# Altium PCB 四路输出继电器工控板.PCBDOC (part 1 of 2)
Units mm, origin at the board's own origin, x right, y up, seen from the top; angles counter-clockwise.
Board outline 152.4 x 101.6 mm, 2 copper layers (Top Layer, Bottom Layer); 59 components, 86 nets, 225 pads, 6 vias.
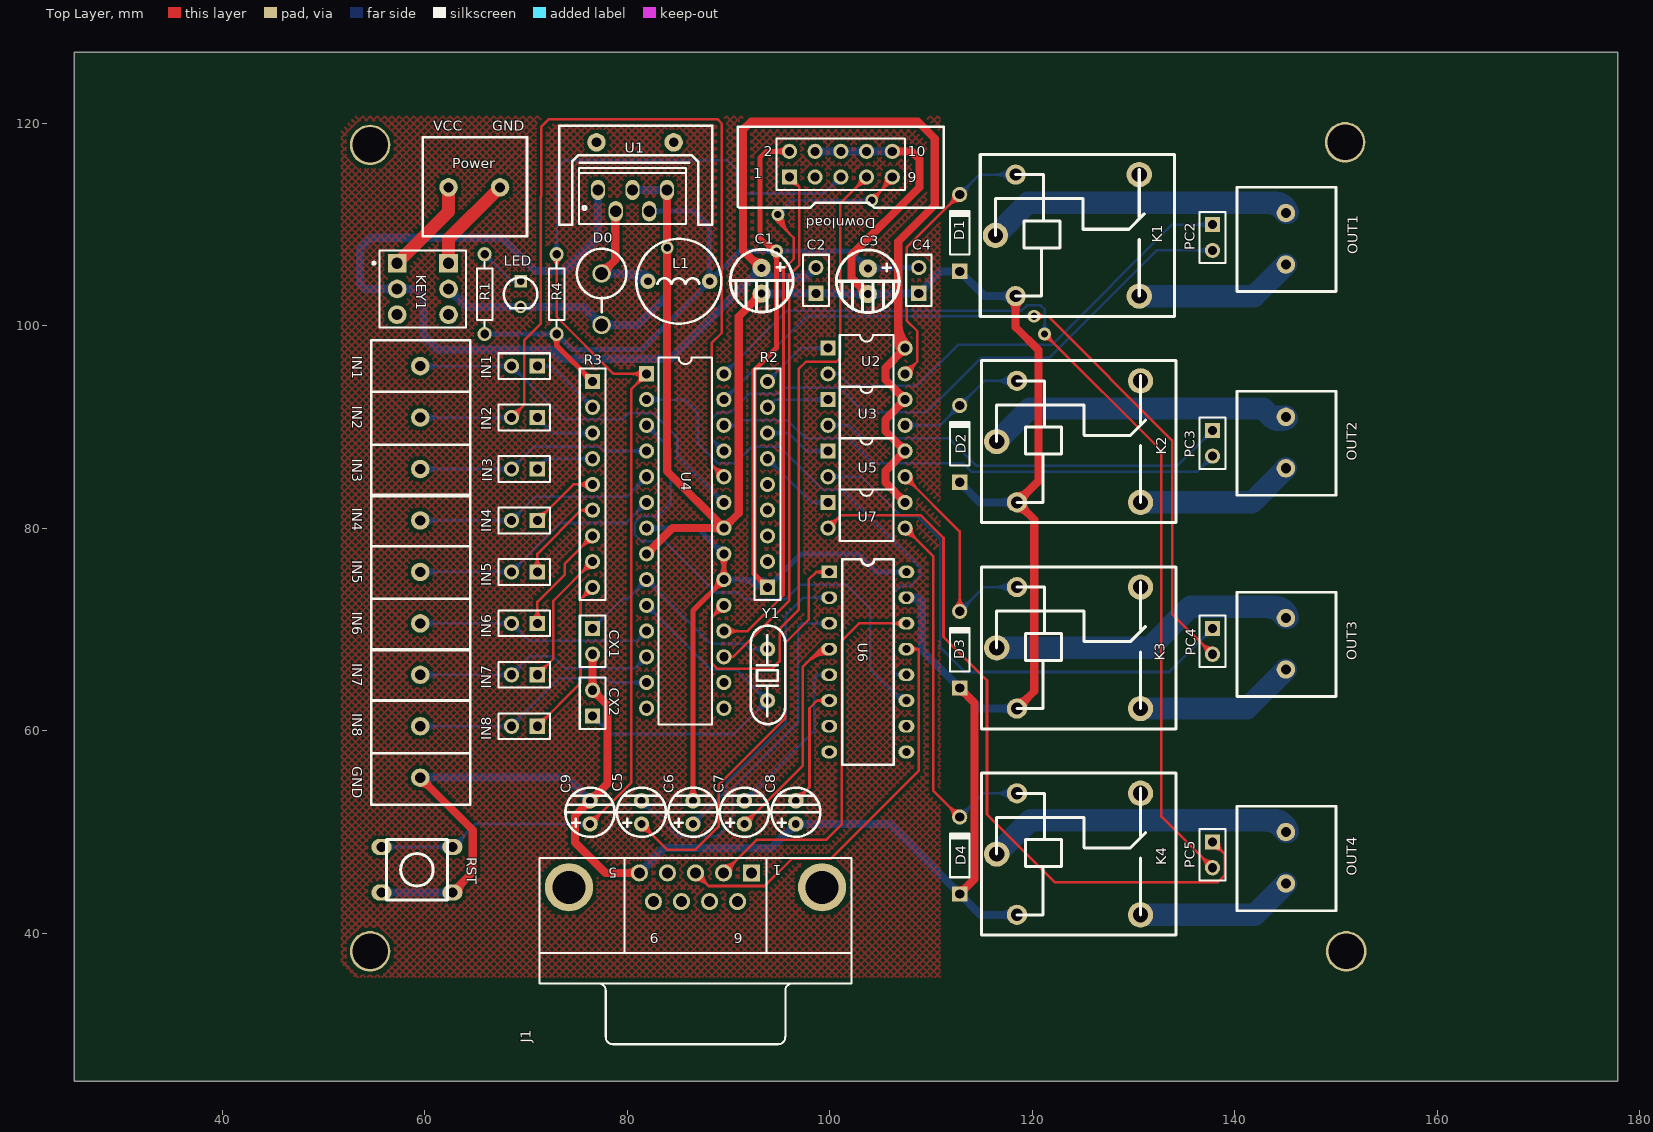
[diagram p0: Top Layer view]
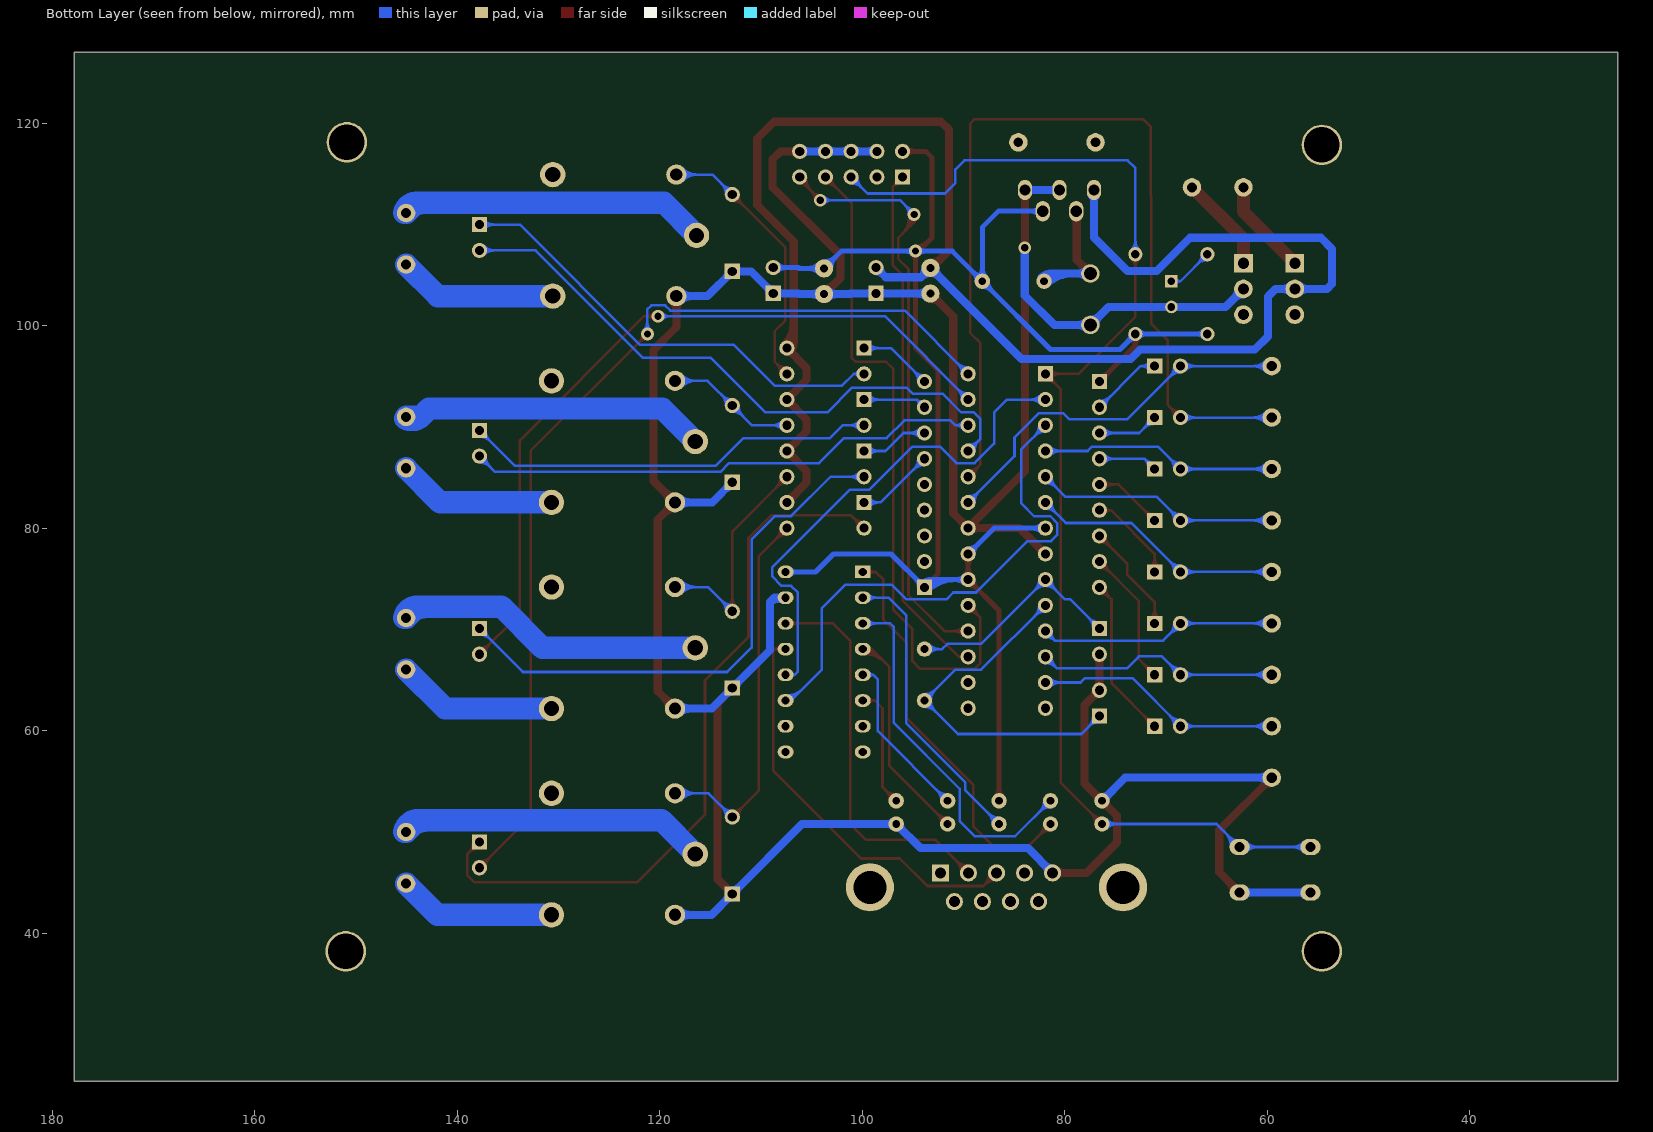
[diagram p1: Bottom Layer view, seen from below]

## Layer stack, top to bottom
Top Layer: signal copper 0.0356
Dielectric: dielectric 0.32, FR-4, Dk 4.8
Bottom Layer: signal copper 0.0356

## Board outline
25.4,25.4 177.8,25.4 177.8,127 25.4,127

## Design rules (kind name [scope] priority, off if disabled: settings)
Clearance [All] p1: gap=0.3
ComponentClearance [All] p1: gap=0.254 collisioncheckmode=3 verticalgap=0.254
PlaneClearance [All] p1: clearance=0.8
PolygonConnect [All] p1: connectstyle=Relief reliefconductorwidth=0.254 reliefentries=4 polygonreliefangle="90 Angle"
RoutingVias [All] p1: holewidth=0.711 width=1.27 viastyle="Through Hole" minholewidth=0.711 minwidth=1.27 maxholewidth=0.711 maxwidth=1.27
SolderMaskExpansion [All] p1: expansion=0.102
TestPointUsage [All] p1: valid=0 allowmultiple=FALSE
Testpoint [All] p1: side=15 testpointundercomponent=TRUE minsize=1.016 maxsize=2.54 preferedsize=1.524 minholesize=0 maxholesize=1.016 preferedholesize=0.813 testpointgrid=0.025 style=1023 order=0123456789
Width Width_7 [InNet('VCC')] p1: maxlimit=0.5 minlimit=0.5 preferedwidth=0.5
Width Width_6 [InNet('NetD0_1')] p2: maxlimit=0.8 minlimit=0.8 preferedwidth=0.8
Width Width_1 [InNet('+12V')] p3: maxlimit=0.8 minlimit=0.8 preferedwidth=0.8
Width Width_3 [InNet('GND')] p4: maxlimit=0.8 minlimit=0.8 preferedwidth=0.8
Width Width_2 [(InNet('NetK1_1') OR InNet('NetK1_3') OR InNet('NetK2_1') OR InNet('NetK2_3') OR InNet('NetK3_1') OR InNet('NetK3_3') OR InNet('NetK4_1') OR InNet('NetK4_3') OR InNet('NetK5_1') OR InNet('NetK5_3') OR InNet('NetK6_1') OR InNet('NetK6_3') OR InNet('NetK7_1') OR InNet('NetK7_3') OR InNet('NetK8_1') OR InNet('NetK8_3'))] p5: maxlimit=2.5 minlimit=2.5 preferedwidth=2.5
Width Width_5 [InNet('NetKEY1_6')] p6: maxlimit=1.254 minlimit=1.254 preferedwidth=1.254
Width Width_4 [InNet('NetKEY1_1')] p7: maxlimit=1.254 minlimit=1.254 preferedwidth=1.254
Width [All] p8: maxlimit=0.254 minlimit=0.254 preferedwidth=0.254
16 further rules are at their usual default settings.

## Components (designator, comment, footprint, x,y, rotation, side; value= is the part's Value field where it differs from the comment)
C1 "DJDR" C-DJ-6 93.345,103.124 r270 top
C2 "CPDR" CPDR 98.628,104.47 r90 top
C3 "DJDR" C-DJ-6 103.835,103.073 r270 top
C4 "CPDR" CPDR 108.788,104.47 r90 top
C5 "10uf" C-DJ-4 83.947,53.213 r90 top
C6 "10uf" C-DJ-4 89.027,53.213 r90 top
C7 "10uf" C-DJ-4 94.107,53.213 r90 top
C8 "10uf" C-DJ-4 99.187,53.213 r90 top
C9 "10uf" C-DJ-4 78.867,53.213 r90 top
CX1 "30p" HDR1X2 76.581,70.104 r270 top
CX2 "30p" HDR1X2 76.581,61.468 r90 top
D0 "WY2JG" ZCDZL 80.01,102.616 r0 top
D1 "ZL2JG" D-ZL-10 112.776,112.903 r90 top
D2 "ZL2JG" D-ZL-10 112.776,92.075 r90 top
D3 "ZL2JG" D-ZL-10 112.776,71.755 r90 top
D4 "ZL2JG" D-ZL-10 112.776,51.435 r90 top
Download "Download" HDR-2x5 101.092,114.808 r0 top (schematic designator 1)
IN1 "LED" HDR1X2 71.12,96.012 r180 top (schematic designator PD1)
IN1 "PZ_3" JK128_3 61.468,91.059 r0 top
IN2 "LED" HDR1X2 71.12,90.932 r180 top (schematic designator PD2)
IN2 "PZ_3" JK128_3 61.468,75.819 r0 top
IN3 "" JK128_3 61.468,60.579 r0 top
IN3 "LED" HDR1X2 71.12,85.852 r180 top (schematic designator PD3)
IN4 "LED" HDR1X2 71.12,80.772 r180 top (schematic designator PD4)
IN5 "LED" HDR1X2 71.12,75.692 r180 top (schematic designator PD5)
IN6 "LED" HDR1X2 71.12,70.612 r180 top (schematic designator PD6)
IN7 "LED" HDR1X2 71.12,65.532 r180 top (schematic designator PD7)
IN8 "LED" HDR1X2 71.12,60.452 r180 top (schematic designator PD8)
J1 "D Connector 9" DSUB1.385-2H9 86.741,35.052 r180 top
K1 "JDQYCK" JQC-3F/T73 116.84,103.432 r0 top
K2 "JDQYCK" JQC-3F/T73 116.967,83.068 r0 top
K3 "JDQYCK" JQC-3F/T73 116.967,62.704 r0 top
K4 "JDQYCK" JQC-3F/T73 116.967,42.34 r0 top
KEY1 "SW-DPST" DPDT-6 59.817,103.632 r0 top
L1 "DG" L_DG 88.138,106.172 r0 top
LED "LED" LED_D 70.993,102.616 r270 top
OUT1 "PZ_2" DYDZ 146.177,110.617 r0 top
OUT2 "PZ_2" DYDZ 146.177,90.496 r0 top
OUT3 "PZ_2" DYDZ 146.177,70.63 r0 top
OUT4 "PZ_2" DYDZ 146.177,49.494 r0 top
PC2 "" CPDR 137.795,108.712 r270 top (schematic designator PC1)
PC3 "" CPDR 137.795,88.392 r270 top (schematic designator PC2)
PC4 "" CPDR 137.795,68.834 r270 top (schematic designator PC3)
PC5 "" CPDR 137.795,47.752 r270 top (schematic designator PC4)
Power "PZ_2" JK128_2 62.865,114.808 r90 top (schematic designator Prower)
R1 "Res" RSE 65.913,103.124 r270 top
R2 "" HDR-9 93.853,89.408 r90 top
R3 "" HDR-9 76.581,79.248 r270 top
R4 "10k" RSE 73.025,103.124 r270 top
RST "" an-6*6 65.405,41.148 r0 top
U1 "LM2576T5.0" LM2576 80.518,112.776 r0 top
U2 "GO" DIP-4 103.632,96.52 r270 top
U3 "GO" DIP-4 103.632,91.44 r270 top
U4 "ATmega8" DIP-28 85.725,78.74 r270 top
U5 "GO" DIP-4 103.632,86.36 r270 top
U6 "MAX232" DIP16 99.949,75.692 r0 top
U7 "GO" DIP-4 103.632,81.28 r270 top
Y1 "Y" JZ_ZC 93.853,68.072 r90 top
? "Comment" SRP 80.772,114.3 r0 top

## Footprints (in the part's own frame and the unit in brackets; to place one, negate y for a bottom-side part, rotate by r counter-clockwise, add the part's x,y. Pads: shape width x height; smd on the part's side, far side on the other; paste and mask are expansions set on the pad)
an-6*6 [mm] "按键"
  oval 2x1.6 hole 1: 1(-9.675,7.381) 1(-2.675,7.381) 2(-9.675,2.881) 2(-2.675,2.881)
  silkscreen extent -9.17,2.13 -3.17,8.13
C-DJ-4 [mil] "电容4mm"
  round 60 hole 30: 1(-95,100) 2(-5,100)
  silkscreen extent -145,4 46,195
C-DJ-6 [mm] "电容6mm"
  round 1.8 hole 0.8: 1(-2.591,-0.076) 2(-0.051,-0.076)
  silkscreen extent -4.42,-3.18 1.78,3.02
CPDR [mm] "瓷片电容"
  rect 1.5x1.5 hole 0.9: 1(-1.27,0)
  round 1.5 hole 0.9: 2(1.27,0)
  silkscreen extent -2.54,-1.27 2.54,1.27
D-ZL-10 [mm] "整流二极管"
  rect 1.5x1.5 hole 0.9: 1(-7.532,-0.051)
  round 1.5 hole 0.9: 2(0.048,-0.051)
  silkscreen extent -5.89,-1 -1.5,0.9
DIP16 [mil] "直插16管脚"
  rect 62x49.21 hole 32: 1(-0.15,-0.04)
  oval 62x49.21 hole 32: 2(-0.15,-100.04) 3(-0.15,-200.04) 4(-0.15,-300.04) 5(-0.15,-400.04) 6(-0.15,-500.04) 7(-0.15,-600.04) 8(-0.15,-700.04) 9(299.85,-700.04) 10(299.85,-600.04) 11(299.85,-500.04) 12(299.85,-400.04) 13(299.85,-300.04) 14(299.85,-200.04) 15(299.85,-100.04) 16(299.85,-0.04)
  silkscreen extent 50,-750 250,50
DIP-4 [mm] "DIP; 4 Leads; Row Spacing 7.62 mm; Pitch 2.54 mm"
  rect 1.5x1.5 hole 0.9: 1(-1.27,-3.81)
  round 1.5 hole 0.9: 2(1.27,-3.81) 3(1.27,3.81) 4(-1.27,3.81)
  silkscreen extent -2.55,-2.65 2.55,2.65
DIP-28 [mm] "直插28管脚"
  rect 1.5x1.5 hole 0.9: 1(-16.51,-3.81)
  round 1.5 hole 0.9: 2(-13.97,-3.81) 3(-11.43,-3.81) 4(-8.89,-3.81) 5(-6.35,-3.81) 6(-3.81,-3.81) 7(-1.27,-3.81) 8(1.27,-3.81) 9(3.81,-3.81) 10(6.35,-3.81) 11(8.89,-3.81) 12(11.43,-3.81) 13(13.97,-3.81) 14(16.51,-3.81) 15(16.51,3.81) 16(13.97,3.81) 17(11.43,3.81) 18(8.89,3.81) 19(6.35,3.81) 20(3.81,3.81) 21(1.27,3.81) 22(-1.27,3.81) 23(-3.81,3.81) 24(-6.35,3.81) 25(-8.89,3.81) 26(-11.43,3.81) 27(-13.97,3.81) 28(-16.51,3.81)
  silkscreen extent -18.1,-2.65 18.1,2.65
DPDT-6 [mm] "Double-Pole, Double-Throw Switch; 6 Leads"
  rect 1.85x1.85 hole 1.1: 1(-2.54,2.54) 6(2.54,2.54)
  round 1.85 hole 1.1: 2(-2.54,0) 3(-2.54,-2.54) 4(2.54,-2.54) 5(2.54,0)
  silkscreen extent -4.96,-3.81 4.28,3.81
DSUB1.385-2H9 [mm] "Connector; D Subminiature; 9 Position; Right Angle; Pitch 1.385 mm"
  rect 1.69x1.69 hole 1.09: 1(-5.54,-10.92)
  round 1.69 hole 1.09: 2(-2.77,-10.92) 3(0,-10.92) 4(2.77,-10.92) 5(5.54,-10.92) 6(-4.155,-8.08) 7(-1.385,-8.08) 8(1.385,-8.08) 9(4.155,-8.08)
  round 4.76 hole 3.26: 10(-12.495,-9.5) 11(12.495,-9.5)
  silkscreen extent -15.4,-12.4 15.4,6
DYDZ [mil] "接线端子"
  round 71.81 hole 39.37: 1(-45,20) 2(-45,-180)
  silkscreen extent -235,-285 150,120
HDR1X2 [mm] "Connector; Header; 2 Position"
  rect 1.5x1.5 hole 0.9: 1(0,0)
  round 1.5 hole 0.9: 2(2.54,0)
  silkscreen extent -1.27,-1.27 3.81,1.27
HDR-2x5 [mm] "下载口"
  rect 1.5x1.5 hole 0.9: 1(-5.08,-0.127)
  round 1.5 hole 0.9: 2(-5.08,2.413) 3(-2.54,-0.127) 4(-2.54,2.413) 5(0,-0.127) 6(0,2.413) 7(2.54,-0.127) 8(2.54,2.413) 9(5.08,-0.127) 10(5.08,2.413)
  silkscreen extent -10.16,-3.17 10.16,4.83
HDR-9 [mm] "10排针"
JK128_2 [mil] "接线端子"
  round 71.81 hole 39.37: 1(-45,20) 2(-45,-180)
  silkscreen extent -235,-285 150,120
JK128_3 [mm] "接线端子_3"
  round 1.824 hole 1: 1(-1.905,4.953) 2(-1.905,-0.127) 3(-1.905,-5.207)
  silkscreen extent -6.73,-7.87 3.05,7.49
JQC-3F/T73 [mm] "继电器"
  round 2.5 hole 1.5: 1(13.716,-0.508) 2(13.716,11.492) 3(-0.484,5.492)
  round 2 hole 1.2: 4(1.516,11.492) 5(1.516,-0.508)
  silkscreen extent -1.98,-2.51 17.22,13.49
JZ_ZC [mil] "晶振"
  round 60 hole 30: 1(-200,0) 2(0,0)
  silkscreen extent -292,-68 92,65
L_DG [mil] "100mH 电感"
  round 60 hole 30: 1(-240,-70) 2(0,-70)
  silkscreen extent -285,-235 45,95
LED_D [mm] "发光二极管_3mm"
  rect 1.25x1.25 hole 0.75: 1(-1.778,-1.524)
  round 1.25 hole 0.75: 2(0.762,-1.524)
  silkscreen extent -2.16,-3.17 0.89,0.13
LM2576 [mm] "LM2576"
  oval 1.4x2 hole 1.1: 1(-3.4,0.635) 2(-1.651,-1.465) 3(0,0.635) 4(1.651,-1.465) 5(3.4,0.635)
  silkscreen extent -5.3,-2.73 5.3,2.8
RSE [mm] "直插电阻1/8W"
  round 1.4 hole 0.85: 1(-3.937,0) 2(3.937,0)
  silkscreen extent -3.17,-0.76 3.17,0.76
SRP [mm] "散热片78XX"
  round 1.824 hole 0.962: 0(-3.81,3.81) 0(3.81,3.81)
  silkscreen extent -7.49,-4.32 7.62,5.46
ZCDZL [mm] "直插电阻立式插"
  round 1.824 hole 1.262: 1(-2.54,2.54) 2(-2.54,-2.54)
  silkscreen extent -4.98,-1.27 -0.1,4.98

## Part data
C1 C3: "电解电容"
C2 C4: "瓷片电容"
C5 C6 C7 C8 C9: library part "CAPACITOR POL", "Capacitor"
CX1 CX2: library part CAP, "Capacitor"
D0: "稳压二级管"
D1 D2 D3 D4: "整流二极管"
Download: library part "Header 5X2", "Header, 5-Pin, Dual row"
IN1 IN2: "排针——3"
IN3: library part PZ_3, "排针——3"
J1: "Receptacle Assembly, 9 Position, Right Angle"
K1 K2 K3 K4: "继电器——1常开1常闭"
KEY1: "Double-Pole, Single-Throw Switch"
L1: "电感"
LED: "发光二极管"
OUT1 OUT2 OUT3 OUT4 Power: "排针——2"
PC2 PC3 PC4 PC5: library part LED, "发光二极管"
R1: "电阻"
R2 R3: library part "Res PZ_8", "8位排阻"
R4: library part RES2
RST: library part SW-PB, "Switch"
U1: library part LM2576HVT-3.3, "Simple Switcher 3A Step Down Voltage Regulator"
U2 U3 U5 U7: "光耦"
U4: library part ATmega8-P, "8 位微处理器/28引脚"
Y1: library part CRYSTAL, "Crystal"

## Free pads (board coordinates)
  round 4 hole 3.5: 0(54.61,117.856) 1(54.61,38.227) 2(151.003,38.227) 3(150.876,118.11)
  rect 1.5x1.5 hole 0.9: 1(76.581,94.488) 1(93.853,74.168)
  round 1.5 hole 0.9: 2(76.581,91.948) 2(93.853,76.708) 3(76.581,89.408) 3(93.853,79.248) 4(76.581,86.868) 4(93.853,81.788) 5(76.581,84.328) 5(93.853,84.328) 6(76.581,81.788) 6(93.853,86.868) 7(76.581,79.248) 7(93.853,89.408) 8(76.581,76.708) 8(93.853,91.948) 9(76.581,74.168) 9(93.853,94.488)

## Via types
v1: diameter 1.27, hole 0.711, Top Layer to Bottom Layer, 6 vias

## Nets (pads, with @x,y where several pads share a name; then routed paths per layer and width w, separated by ;. In a path a pad name is that pad's centre, name@x,y a point inside that pad or via, vN(x,y) a via of type N, cw(c..) or ccw(c..) an arc to the next point about the centre after c; other vN are vias at no path point)
+12V: C1.1 C2.2 KEY1.2 U1.1 U2.4 U3.4 U5.4 U7.4 | length 191.7
  Top Layer w0.8: 92.242,106.64 ccw(c93.269,107.667) C1.1@93.269,106.215 ; 92.487,106.395 cw(c91.807,105.715) C1.1@92.769,105.715 ; C1.1@93.269,105.715 93.167,105.715 91.44,107.442 91.44,119.38 92.202,120.142 108.712,120.142 110.363,118.491 110.363,111.938 106.756,108.331 106.756,98.476 U2.4@107.442,97.79 105.486,95.834 105.486,94.666 U3.4@107.442,92.71 105.486,90.754 105.486,89.586 U5.4@107.442,87.63 105.486,85.674 105.486,84.506 U7.4@107.442,82.55 ; 106.756,98.359 ccw(c108.011,98.359) U2.4@107.124,97.472 ; 106.756,100.291 ccw(c109.943,100.291) U2.4@107.689,98.037 ; U7.4@107.092,82.55 ccw(c106.247,82.55) 106.845,83.147 ccw(c107.442,83.745) U7.4@107.442,82.9 ; U5.4@107.442,87.28 ccw(c107.442,86.435) 106.845,87.033 ccw(c106.247,87.63) 107.092,87.63 ccw(c106.247,87.63) 106.845,88.227 ccw(c107.442,88.825) U5.4@107.442,87.98 ; U3.4@107.442,92.36 ccw(c107.442,91.515) 106.845,92.113 ccw(c106.247,92.71) 107.092,92.71 ccw(c106.247,92.71) 106.845,93.307 ccw(c107.442,93.905) U3.4@107.442,93.06 ; U2.4@107.442,97.44 ccw(c107.442,96.595) 106.845,97.193 ccw(c106.247,97.79) 107.092,97.79 ccw(c106.247,97.79) 106.845,98.387 ccw(c107.442,98.985) U2.4@107.442,98.14
  Bottom Layer w0.8: KEY1.2@56.906,103.261 ccw(c56.01,102.365) 56.01,103.632 ccw(c56.01,104.899) KEY1.2@56.906,104.003 ; KEY1.2@57.648,103.261 cw(c58.544,102.365) 58.544,103.632 cw(c58.544,104.899) KEY1.2@57.648,104.003 ; U1.1@76.906,112.899 cw(c76.394,112.387) 77.118,112.387 cw(c77.842,112.387) U1.1@77.33,112.899 ; U1.1@77.118,113.411 77.118,108.716 73.812,105.41 70.917,105.41 67.64,108.687 54.712,108.687 53.594,107.569 53.594,104.14 54.102,103.632 KEY1.2@57.277,103.632 59.182,103.632 59.944,102.87 59.944,98.933 61.239,97.638 72.542,97.638 73.48,96.7 84.254,96.7 C1.1@93.269,105.715 94.193,104.79 97.678,104.79 C2.2@98.628,105.74 ; C1.1@92.769,105.715 cw(c91.562,105.715) 92.415,104.861 cw(c93.269,104.008) 93.269,105.215 cw(c93.269,104.008) 94.122,104.861 cw(c94.976,105.715) C1.1@93.769,105.715 ; C2.2@98.278,105.74 cw(c97.433,105.74) 98.031,105.143 cw(c98.628,104.545) C2.2@98.628,105.39
GND: C1.2 C2.1 C3.2 C4.1 C8.1 C9.2 CX1.2 CX2.2 D0.2 D1.1 D2.1 D3.1 D4.1 Download.4 Download.6 Download.8 Download.10 IN3.3 J1.5 K1.5 K2.5 K3.5 K4.5 KEY1.5 LED.2 RST.2 U1.3 U1.5 U4.8 U4.22 U6.15 | length 449.9
  Top Layer w0.8: IN3.3@59.563,54.86 cw(c59.563,53.624) 60.437,54.498 cw(c61.311,55.372) IN3.3@60.075,55.372 ; IN3.3@59.563,55.372 64.745,50.19 64.745,46.043 RST.2@62.73,44.029 ; RST.2@63.33,44.029 cw(c64.779,44.029) 63.754,45.053 ; C9.2@75.965,53.086 cw(c75.091,53.086) 75.709,52.468 cw(c76.327,51.85) C9.2@76.327,52.724 ; C9.2@76.327,53.448 ccw(c76.327,54.322) 76.945,53.704 ccw(c77.563,53.086) C9.2@76.689,53.086 ; CX2.2@76.334,64.255 ccw(c75.736,64.853) 76.581,64.853 ccw(c77.426,64.853) CX2.2@76.828,64.255 ; CX1.2@76.334,67.317 cw(c75.736,66.719) 76.581,66.719 cw(c77.426,66.719) CX1.2@76.828,67.317 ; CX2.2@76.581,63.658 cw(c76.581,62.813) 77.178,63.411 cw(c77.776,64.008) CX2.2@76.931,64.008 ; CX1.2@76.581,67.564 CX2.2@76.581,64.008 78.054,62.535 78.054,54.813 C9.2@76.327,53.086 74.854,51.613 74.854,48.971 77.853,45.972 J1.5@81.201,45.972 ; J1.5@80.886,45.657 ccw(c80.127,44.898) 80.127,45.972 ccw(c80.127,47.046) J1.5@80.886,46.287 ; U4.8@81.915,77.47 84.455,80.01 U4.22@89.535,80.01 ; U4.8@81.915,77.82 ccw(c81.915,78.665) 82.512,78.067 ccw(c83.11,77.47) U4.8@82.265,77.47 ; U1.5@83.706,112.899 cw(c83.194,112.387) 83.918,112.387 cw(c84.642,112.387) U1.5@84.13,112.899 ; 83.918,107.059 cw(c84.584,107.059) v1@84.113,107.53 ; 83.918,108.333 ccw(c84.584,108.333) v1@84.113,107.862 ; U1.5@83.918,113.411 v1@83.918,107.725 ; v1(83.947,107.696) v1@83.918,107.725 ; U4.22@89.185,80.01 ccw(c88.34,80.01) 88.938,80.607 ccw(c89.535,81.205) 89.535,80.36 ccw(c89.535,81.205) 90.132,80.607 ccw(c90.73,80.01) U4.22@89.885,80.01 ; U4.22@89.288,79.763 ccw(c88.69,79.165) 88.69,80.01 ccw(c88.69,80.855) U4.22@89.288,80.257 ; C1.2@92.769,103.175 cw(c91.562,103.175) 92.415,102.321 cw(c93.269,101.468) C1.2@93.269,102.675 ; C1.2@93.269,103.175 91.008,100.914 91.008,81.483 U4.22@89.535,80.01 ; C3.2@103.259,103.124 ccw(c102.052,103.124) 102.905,103.978 ccw(c103.759,104.831) C3.2@103.759,103.624 ; C3.2@103.759,103.124 102.159,104.724 102.159,106.985 108.839,113.665 108.839,116.459 108.077,117.221 Download.10@106.172,117.221 ; Download.10@106.419,116.974 cw(c107.017,116.376) 107.017,117.221 cw(c107.017,118.066) Download.10@106.419,117.468 ; D4.1@112.827,43.903 114.3,45.376 114.3,62.75 D3.1@112.827,64.223 ; D4.1@112.827,44.253 ccw(c112.827,45.098) 113.425,44.501 ccw(c114.022,43.903) D4.1@113.177,43.903 ; D3.1@112.827,63.873 cw(c112.827,63.028) 113.425,63.626 cw(c114.022,64.223) D3.1@113.177,64.223 ; K1.5@117.932,102.5 cw(c116.907,101.476) 118.356,101.476 cw(c119.805,101.476) K1.5@118.78,102.5 ; K1.5@118.356,102.924 118.356,99.847 120.599,97.604 120.599,84.676 K2.5@118.483,82.56 120.193,80.85 120.193,63.906 K3.5@118.483,62.196 ; K3.5@118.483,62.796 ccw(c118.483,64.245) 119.507,63.22 ccw(c120.532,62.196) K3.5@119.083,62.196 ; K2.5@118.483,81.96 cw(c118.483,80.512) 119.507,81.536 cw(c120.532,82.56) 119.083,82.56 cw(c120.532,82.56) 119.507,83.584 cw(c118.483,84.609) K2.5@118.483,83.16 ; v1@83.918,107.725 83.918,107.696 83.918,85.627 U4.22@89.535,80.01
  Bottom Layer w0.8: RST.2@55.73,44.029 RST.2@62.73,44.029 ; RST.2@56.213,43.746 cw(c56.896,43.063) 56.896,44.029 cw(c56.896,44.994) RST.2@56.213,44.312 ; IN3.3@59.563,55.372 74.041,55.372 C9.2@76.327,53.086 ; IN3.3@59.925,55.01 cw(c60.799,54.136) 60.799,55.372 cw(c60.799,56.608) IN3.3@59.925,55.734 ; RST.2@62.247,43.746 ccw(c61.564,43.063) 61.564,44.029 ccw(c61.564,44.994) RST.2@62.247,44.312 ; KEY1.5@62.357,103.107 cw(c62.357,101.84) 63.253,102.736 cw(c64.149,103.632) KEY1.5@62.882,103.632 ; KEY1.5@62.357,103.632 64.135,101.854 LED.2@69.469,101.854 75.692,101.854 D0.2@77.47,100.076 81.026,100.076 83.947,102.997 v1(83.947,107.696) ; C9.2@75.965,53.086 ccw(c75.091,53.086) 75.709,53.704 ccw(c76.327,54.322) C9.2@76.327,53.448 ; D0.2@76.958,100.076 ccw(c75.722,100.076) 76.596,100.95 ccw(c77.47,101.824) D0.2@77.47,100.588 ; D0.2@77.832,99.714 cw(c78.706,98.84) 78.706,100.076 cw(c78.706,101.312) D0.2@77.832,100.438 ; U1.3@80.518,113.411 U1.5@83.918,113.411 ; U1.3@80.73,113.199 cw(c81.242,112.687) 81.242,113.411 cw(c81.242,114.135) U1.3@80.73,113.623 ; J1.5@81.201,45.972 83.641,48.412 94.259,48.412 C8.1@96.647,50.8 105.93,50.8 D4.1@112.827,43.903 114.898,41.832 K4.5@118.483,41.832 ; J1.5@81.201,46.417 ccw(c81.201,47.491) 81.961,46.732 ccw(c82.72,45.972) J1.5@81.646,45.972 ; U1.5@83.706,113.199 ccw(c83.194,112.687) 83.194,113.411 ccw(c83.194,114.135) U1.5@83.706,113.623 ; C1.2@93.269,103.175 95.936,103.175 95.961,103.2 C2.1@98.628,103.2 101.143,103.2 101.219,103.124 C3.2@103.759,103.124 106.223,103.124 106.299,103.2 C4.1@108.788,103.2 110.959,105.371 D1.1@112.827,105.371 115.274,102.924 K1.5@118.356,102.924 ; C1.2@93.622,102.821 cw(c94.476,101.968) 94.476,103.175 cw(c94.476,104.382) C1.2@93.622,103.528 ; C8.1@96.285,50.8 cw(c95.411,50.8) 96.029,50.182 cw(c96.647,49.564) C8.1@96.647,50.438 ; C8.1@96.903,50.544 cw(c97.521,49.926) 97.521,50.8 cw(c97.521,51.674) C8.1@96.903,51.056 ; C2.1@98.381,102.953 ccw(c97.783,102.355) 97.783,103.2 ccw(c97.783,104.045) C2.1@98.381,103.448 ; Download.4@98.552,117.221 Download.6@101.092,117.221 Download.8@103.632,117.221 Download.10@106.172,117.221 ; Download.4@98.799,116.974 cw(c99.397,116.376) 99.397,117.221 cw(c99.397,118.066) Download.4@98.799,117.468 ; C2.1@98.876,102.953 cw(c99.473,102.355) 99.473,103.2 cw(c99.473,104.045) C2.1@98.876,103.448 ; Download.6@100.845,116.974 ccw(c100.247,116.376) 100.247,117.221 ccw(c100.247,118.066) Download.6@100.845,117.468 ; Download.6@101.339,116.974 cw(c101.937,116.376) 101.937,117.221 cw(c101.937,118.066) Download.6@101.339,117.468 ; Download.8@103.385,116.974 ccw(c102.787,116.376) 102.787,117.221 ccw(c102.787,118.066) Download.8@103.385,117.468 ; C3.2@103.405,102.77 ccw(c102.552,101.917) 102.552,103.124 ccw(c102.552,104.331) C3.2@103.405,103.478 ; Download.8@103.879,116.974 cw(c104.477,116.376) 104.477,117.221 cw(c104.477,118.066) Download.8@103.879,117.468 ; C3.2@104.113,102.77 cw(c104.966,101.917) 104.966,103.124 cw(c104.966,104.331) C3.2@104.113,103.478 ; Download.10@105.925,116.974 ccw(c105.327,116.376) 105.327,117.221 ccw(c105.327,118.066) Download.10@105.925,117.468 ; U6.15@107.565,73.151 108.649,73.151 109.093,72.707 109.093,67.957 D3.1@112.827,64.223 114.854,62.196 K3.5@118.483,62.196 ; U6.15@107.815,72.944 cw(c108.274,71.854) 109.11,72.69 ; C4.1@108.541,102.953 ccw(c107.943,102.355) 107.943,103.2 ccw(c107.943,104.045) C4.1@108.541,103.448 ; C4.1@108.788,103.55 ccw(c108.788,104.395) 109.386,103.798 ccw(c109.983,103.2) C4.1@109.138,103.2 ; D4.1@112.477,43.903 ccw(c111.632,43.903) 112.23,44.501 ccw(c112.827,45.098) D4.1@112.827,44.253 ; D3.1@112.477,64.223 ccw(c111.632,64.223) 112.23,64.821 ccw(c112.827,65.418) D3.1@112.827,64.573 ; D1.1@112.58,105.124 ccw(c111.982,104.526) 111.982,105.371 ccw(c111.982,106.216) D1.1@112.58,105.619 ; D4.1@112.827,43.553 cw(c112.827,42.708) 113.425,43.306 cw(c114.022,43.903) D4.1@113.177,43.903 ; D3.1@112.827,63.873 cw(c112.827,63.028) 113.425,63.626 cw(c114.022,64.223) D3.1@113.177,64.223 ; D2.1@112.827,84.193 cw(c112.827,83.348) 113.425,83.946 cw(c114.022,84.543) D2.1@113.177,84.543 ; D2.1@112.827,84.543 114.81,82.56 K2.5@118.483,82.56 ; D1.1@112.827,105.021 cw(c112.827,104.176) 113.425,104.774 cw(c114.022,105.371) D1.1@113.177,105.371 ; K1.5@117.932,102.5 ccw(c116.907,101.476) 116.907,102.924 ccw(c116.907,104.373) K1.5@117.932,103.348 ; K4.5@118.059,41.408 ccw(c117.034,40.384) 117.034,41.832 ccw(c117.034,43.281) K4.5@118.059,42.256 ; K3.5@118.059,61.772 ccw(c117.034,60.748) 117.034,62.196 ccw(c117.034,63.645) K3.5@118.059,62.62 ; K2.5@118.059,82.136 ccw(c117.034,81.112) 117.034,82.56 ccw(c117.034,84.009) K2.5@118.059,82.984
NetC5_1: C5.1 U6.1 | length 45.5
  Top Layer w0.254: C5.1@81.407,50.165 cw(c81.407,48.632) 82.491,49.716 cw(c83.575,50.8) C5.1@82.042,50.8 ; C5.1@81.407,50.419 cw(c81.407,49.499) 82.057,50.15 cw(c82.708,50.8) C5.1@81.788,50.8 ; C5.1@81.407,50.8 83.947,48.26 86.741,48.26 89.027,50.546 89.027,54.635 95.596,61.204 95.596,68.647 97.917,70.968 97.917,74.93 98.678,75.691 ; U6.1@99.41,75.361 ccw(c98.678,74.715) 98.678,75.691 ; U6.1@99.41,76.021 cw(c98.678,76.667) 98.678,75.691 ; U6.1@99.945,75.691 98.678,75.691
NetC5_2: C5.2 U6.3 | length 41.8
  Bottom Layer w0.254: C5.2@81.407,52.451 cw(c81.407,50.918) 82.491,52.002 cw(c83.575,53.086) C5.2@82.042,53.086 ; C5.2@81.407,52.705 cw(c81.407,51.785) 82.057,52.436 cw(c82.708,53.086) C5.2@81.788,53.086 ; C5.2@81.407,53.086 84.887,49.606 88.9,49.606 90.373,51.079 90.373,54.28 96.876,60.782 96.876,70.255 97.231,70.611 U6.3@99.945,70.611 ; U6.3@99.431,70.259 ccw(c98.581,69.409) 98.581,70.611 ccw(c98.581,71.813) U6.3@99.431,70.963
NetC6_1: C6.1 U6.2 | length 35.2
  Bottom Layer w0.254: C6.1@86.487,50.8 89.814,54.127 89.814,54.915 95.631,60.731 95.631,71.399 97.383,73.151 U6.2@99.945,73.151 ; C6.1@86.487,51.181 ccw(c86.487,52.101) 87.137,51.45 ccw(c87.788,50.8) C6.1@86.868,50.8 ; C6.1@86.487,51.435 ccw(c86.487,52.968) 87.571,51.884 ccw(c88.655,50.8) C6.1@87.122,50.8 ; U6.2@99.431,72.799 ccw(c98.581,71.949) 98.581,73.151 ccw(c98.581,74.353) U6.2@99.431,73.503
NetC7_1: C7.1 U6.4 | length 34.6
  Top Layer w0.254: C7.1@91.567,50.8 97.333,56.566 97.333,66.344 99.06,68.071 ; C7.1@91.567,51.181 ccw(c91.567,52.101) 92.217,51.45 ccw(c92.868,50.8) C7.1@91.948,50.8 ; C7.1@91.567,51.435 ccw(c91.567,52.968) 92.651,51.884 ccw(c93.735,50.8) C7.1@92.202,50.8 ; 97.699,66.71 cw(c99.783,64.626) U6.4@99.783,67.573 ; 98.132,67.143 cw(c99.783,65.493) U6.4@99.783,67.827 ; 98.566,67.577 cw(c99.783,66.36) U6.4@99.783,68.081 ; 98.699,67.71 cw(c99.069,67.339) U6.4@99.435,67.714 ; 98.881,67.892 cw(c99.249,67.523) U6.4@99.612,67.896 ; 99,68.011 cw(c99.783,67.227) U6.4@99.783,68.335 ; 99.062,68.074 cw(c99.428,67.707) U6.4@99.79,68.078 ; U6.4@99.317,67.894 ccw(c99.06,67.796) 99.06,68.071 ; U6.4@99.317,68.248 cw(c99.06,68.347) 99.06,68.071 ; U6.4@99.945,68.071 99.06,68.071
NetC7_2: C7.2 U6.5 | length 21.5
  Bottom Layer w0.254: C7.2@91.567,53.086 98.45,59.969 98.45,65.087 98.894,65.531 ; C7.2@91.567,53.467 ccw(c91.567,54.387) 92.217,53.736 ccw(c92.868,53.086) C7.2@91.948,53.086 ; C7.2@91.567,53.721 ccw(c91.567,55.254) 92.651,54.17 ccw(c93.735,53.086) C7.2@92.202,53.086 ; U6.5@99.358,65.271 ccw(c98.894,64.987) 98.894,65.531 ; U6.5@99.358,65.791 cw(c98.894,66.075) 98.894,65.531 ; U6.5@99.945,65.531 98.894,65.531
NetC8_2: C8.2 U6.6 | length 17.3
  Top Layer w0.254: C8.2@96.647,53.086 97.993,54.432 97.993,62.23 98.754,62.991 ; C8.2@96.647,53.467 ccw(c96.647,54.387) 97.297,53.736 ccw(c97.948,53.086) C8.2@97.028,53.086 ; C8.2@96.647,53.721 ccw(c96.647,55.254) 97.731,54.17 ccw(c98.815,53.086) C8.2@97.282,53.086 ; U6.6@99.392,62.682 ccw(c98.754,62.178) 98.754,62.991 ; U6.6@99.392,63.3 cw(c98.754,63.804) 98.754,62.991 ; U6.6@99.945,62.991 98.754,62.991
NetD0_1: D0.1 L1.1 U1.2 | length 21.5
  Top Layer w0.8: D0.1@77.47,105.156 78.818,106.504 78.818,111.311 U1.2@78.867,111.311 ; D0.1@77.47,105.668 ccw(c77.47,106.904) 78.344,106.03 ccw(c79.218,105.156) D0.1@77.982,105.156 ; 78.818,110.168 cw(c79.709,110.168) U1.2@79.079,110.799
  Bottom Layer w0.8: D0.1@77.47,105.156 81.28,105.156 L1.1@82.042,104.394 ; D0.1@77.832,104.794 cw(c78.706,103.92) 78.706,105.156 cw(c78.706,106.392) D0.1@77.832,105.518 ; 79.328,105.156 cw(c79.328,101.68) L1.1@81.786,104.138 ; 81.26,105.156 cw(c81.26,103.612) L1.1@82.352,104.704 ; L1.1@81.68,104.394 ccw(c80.806,104.394) 81.424,105.012 ccw(c82.042,105.63) L1.1@82.042,104.756
NetD1_2: D1.2 K1.4 U2.3 | length 44.1
  Top Layer w0.254: U2.3@107.442,95.25 108.636,96.444 108.636,99.466 107.594,100.508 107.594,107.718 D1.2@112.827,112.951 ; U2.3@107.442,95.619 ccw(c107.442,96.51) 108.072,95.88 ccw(c108.702,95.25) U2.3@107.811,95.25 ; U2.3@107.442,95.873 ccw(c107.442,97.377) 108.506,96.314 ccw(c109.569,95.25) U2.3@108.065,95.25 ; D1.2@112.204,112.951 cw(c110.7,112.951) 111.764,111.888 cw(c112.827,110.824) D1.2@112.827,112.328 ; D1.2@112.458,112.951 cw(c111.567,112.951) 112.197,112.321 cw(c112.827,111.691) D1.2@112.827,112.582
  Bottom Layer w0.254: D1.2@112.827,112.951 114.8,114.924 K1.4@118.356,114.924 ; D1.2@112.827,113.32 ccw(c112.827,114.211) 113.457,113.581 ccw(c114.087,112.951) D1.2@113.196,112.951 ; D1.2@112.827,113.574 ccw(c112.827,115.078) 113.891,114.015 ccw(c114.954,112.951) D1.2@113.45,112.951 ; K1.4@117.739,114.307 ccw(c116.248,112.816) 116.248,114.924 ccw(c116.248,117.032) K1.4@117.739,115.541 ; K1.4@117.918,114.486 ccw(c116.862,113.43) 116.862,114.924 ccw(c116.862,116.418) K1.4@117.918,115.362
NetD2_2: D2.2 K2.4 U3.3 | length 29.8
  Bottom Layer w0.254: U3.3@107.442,90.17 110.874,90.17 D2.2@112.827,92.123 115.264,94.56 K2.4@118.483,94.56 ; U3.3@107.703,89.909 cw(c108.333,89.279) 108.333,90.17 cw(c108.333,91.061) U3.3@107.703,90.431 ; U3.3@107.883,89.729 cw(c108.946,88.666) 108.946,90.17 cw(c108.946,91.674) U3.3@107.883,90.611 ; D2.2@112.204,92.123 cw(c110.7,92.123) 111.764,91.06 cw(c112.827,89.996) D2.2@112.827,91.5 ; D2.2@112.458,92.123 cw(c111.567,92.123) 112.197,91.493 cw(c112.827,90.863) D2.2@112.827,91.754 ; D2.2@112.827,92.492 ccw(c112.827,93.383) 113.457,92.753 ccw(c114.087,92.123) D2.2@113.196,92.123 ; D2.2@112.827,92.746 ccw(c112.827,94.25) 113.891,93.187 ccw(c114.954,92.123) D2.2@113.45,92.123 ; K2.4@117.866,93.943 ccw(c116.375,92.452) 116.375,94.56 ccw(c116.375,96.668) K2.4@117.866,95.177 ; K2.4@118.045,94.122 ccw(c116.989,93.066) 116.989,94.56 ccw(c116.989,96.054) K2.4@118.045,94.998
NetD3_2: D3.2 K3.4 U5.3 | length 39.1
  Top Layer w0.254: U5.3@107.442,84.467 cw(c107.442,82.963) 108.506,84.026 cw(c109.569,85.09) U5.3@108.065,85.09 ; U5.3@107.442,84.721 cw(c107.442,83.83) 108.072,84.46 cw(c108.702,85.09) U5.3@107.811,85.09 ; U5.3@107.442,85.09 112.827,79.705 D3.2@112.827,71.803 ; D3.2@112.387,72.244 ccw(c111.323,73.307) 112.827,73.307 ccw(c114.331,73.307) D3.2@113.268,72.244 ; D3.2@112.566,72.064 ccw(c111.936,72.694) 112.827,72.694 ccw(c113.718,72.694) D3.2@113.088,72.064
  Bottom Layer w0.254: D3.2@112.827,71.803 115.22,74.196 K3.4@118.483,74.196 ; D3.2@112.827,72.172 ccw(c112.827,73.063) 113.457,72.433 ccw(c114.087,71.803) D3.2@113.196,71.803 ; D3.2@112.827,72.426 ccw(c112.827,73.93) 113.891,72.867 ccw(c114.954,71.803) D3.2@113.45,71.803 ; K3.4@117.866,73.579 ccw(c116.375,72.088) 116.375,74.196 ccw(c116.375,76.304) K3.4@117.866,74.813 ; K3.4@118.045,73.758 ccw(c116.989,72.702) 116.989,74.196 ccw(c116.989,75.69) K3.4@118.045,74.634
NetD4_2: D4.2 K4.4 U7.3 | length 54.3
  Top Layer w0.254: U7.3@107.442,79.387 cw(c107.442,77.883) 108.506,78.946 cw(c109.569,80.01) U7.3@108.065,80.01 ; U7.3@107.442,79.641 cw(c107.442,78.75) 108.072,79.38 cw(c108.702,80.01) U7.3@107.811,80.01 ; U7.3@107.442,80.01 110.211,77.241 110.211,54.1 D4.2@112.827,51.483 ; D4.2@112.204,51.483 ccw(c110.7,51.483) 111.764,52.547 ccw(c112.827,53.61) D4.2@112.827,52.106 ; D4.2@112.458,51.483 ccw(c111.567,51.483) 112.197,52.113 ccw(c112.827,52.743) D4.2@112.827,51.852
  Bottom Layer w0.254: D4.2@112.827,51.483 115.176,53.832 K4.4@118.483,53.832 ; D4.2@112.827,51.852 ccw(c112.827,52.743) 113.457,52.113 ccw(c114.087,51.483) D4.2@113.196,51.483 ; D4.2@112.827,52.106 ccw(c112.827,53.61) 113.891,52.547 ccw(c114.954,51.483) D4.2@113.45,51.483 ; K4.4@117.866,53.215 ccw(c116.375,51.724) 116.375,53.832 ccw(c116.375,55.94) K4.4@117.866,54.449 ; K4.4@118.045,53.394 ccw(c116.989,52.338) 116.989,53.832 ccw(c116.989,55.326) K4.4@118.045,54.27
NetD5_2: 
NetD6_2: 
NetD7_2: 
NetD8_2: 
NetJ1_2: J1.2 U6.14 | length 45.3
  Top Layer w0.254: J1.2@89.511,45.972 92.764,49.225 99.619,49.225 101.194,50.8 101.194,68.935 102.87,70.611 U6.14@107.565,70.611 ; J1.2@89.511,46.436 ccw(c89.511,47.556) 90.303,46.764 ccw(c91.095,45.972) J1.2@89.975,45.972 ; J1.2@89.511,46.69 ccw(c89.511,48.423) 90.737,47.198 ccw(c91.962,45.972) J1.2@90.229,45.972 ; U6.14@107.051,70.259 ccw(c106.201,69.409) 106.201,70.611 ccw(c106.201,71.813) U6.14@107.051,70.963
NetJ1_3: J1.3 U6.13 | length 46.5
  Top Layer w0.254: J1.3@86.741,45.254 cw(c86.741,43.521) 87.967,44.746 cw(c89.192,45.972) J1.3@87.459,45.972 ; J1.3@86.741,45.508 cw(c86.741,44.388) 87.533,45.18 cw(c88.325,45.972) J1.3@87.205,45.972 ; J1.3@86.741,45.972 88.034,44.679 93.574,44.679 96.291,47.396 100.101,47.396 108.788,56.083 108.788,68.071 ; U6.13@107.565,68.071 108.788,68.071 ; U6.13@108.111,67.753 cw(c108.788,67.191) 108.788,68.071 ; U6.13@108.111,68.389 ccw(c108.788,68.951) 108.788,68.071
NetK1_1: K1.1 OUT1.2 | length 15.8
  Bottom Layer w2.2: K1.1@130.556,102.924 141.913,102.924 OUT1.2@145.034,106.045
NetK1_3: K1.3 OUT1.1 | length 34.5
  Bottom Layer w2.2: K1.3@116.356,108.924 119.573,112.141 144.018,112.141 ; 143.035,112.141 cw(c143.035,109.125) OUT1.1@145.167,111.258 ; OUT1.1@145.034,111.125 144.018,112.141 ; OUT1.1@145.218,111.163 ccw(c144.018,110.916) 144.018,112.141
NetK2_1: K2.1 OUT2.2 | length 15.7
  Bottom Layer w2.2: K2.1@130.683,82.56 141.67,82.56 OUT2.2@145.034,85.924
NetK2_3: K2.3 OUT2.1 | length 32
  Bottom Layer w2.2: K2.3@116.483,88.56 119.744,91.821 142.77,91.821 143.586,91.004 OUT2.1@145.034,91.004 ; 143.494,91.097 ccw(c144.486,92.09) OUT2.1@145.119,90.837
NetK3_1: K3.1 OUT3.2 | length 16
  Bottom Layer w2.2: K3.1@130.683,62.196 141.172,62.196 OUT3.2@145.034,66.058
NetK3_3: K3.3 OUT3.1 | length 35.2
  Bottom Layer w2.2: K3.3@116.483,68.196 131.569,68.196 135.636,72.263 143.909,72.263 ; 142.772,72.263 cw(c142.772,68.876) OUT3.1@145.167,71.271 ; OUT3.1@145.034,71.138 143.909,72.263 ; OUT3.1@145.219,71.172 ccw(c143.909,70.931) 143.909,72.263
NetK4_1: K4.1 OUT4.2 | length 15.6
  Bottom Layer w2.2: K4.1@130.683,41.832 141.944,41.832 OUT4.2@145.034,44.922
NetK4_3: K4.3 OUT4.1 | length 35.2
  Bottom Layer w2.2: K4.3@116.483,47.832 119.832,51.181 143.855,51.181 ; 142.64,51.181 cw(c142.64,47.608) OUT4.1@145.167,50.135 ; OUT4.1@145.034,50.002 143.855,51.181 ; OUT4.1@145.219,50.034 ccw(c143.855,49.796) 143.855,51.181
NetK5_1: 
NetK5_3: 
NetK6_1: 
NetK6_3: 
NetK7_1: 
NetK7_3: 
NetK8_1: 
NetK8_3: 
NetKEY1_1: KEY1.1 Power.1 | length 9.6
  Top Layer w1.254: KEY1.1@57.277,106.172 62.357,111.252 Power.1@62.357,113.665
NetKEY1_6: KEY1.6 Power.2 | length 9.6
  Top Layer w1.254: KEY1.6@62.357,106.172 62.357,108.585 Power.2@67.437,113.665
NetLED_1: LED.1 R1.1 | length 9.2
  Bottom Layer w0.254: R1.1@65.913,106.488 cw(c65.913,105.105) 66.891,106.083 cw(c67.869,107.061) R1.1@66.486,107.061 ; R1.1@65.913,106.742 cw(c65.913,105.972) 66.458,106.516 cw(c67.002,107.061) R1.1@66.232,107.061 ; R1.1@65.913,107.061 68.58,104.394 ; LED.1@69.044,104.134 ccw(c68.58,103.85) 68.58,104.394 ; LED.1@69.044,104.654 cw(c68.58,104.938) 68.58,104.394 ; LED.1@69.469,104.394 68.58,104.394
NetPB1_1: 
NetPB2_1: 
NetPB3_1: 
NetPB4_1: 
NetPC1_1: PC2.1 U2.2 | length 50
  Bottom Layer w0.254: U2.2@99.822,95.25 100.833,95.25 ; U2.2@100.378,94.97 cw(c100.833,94.741) 100.833,95.25 ; U2.2@100.378,95.53 ccw(c100.833,95.759) 100.833,95.25 ; PC2.1@137.354,109.541 ccw(c136.291,108.478) 136.291,109.982 ccw(c136.291,111.486) PC2.1@137.354,110.423 ; PC2.1@137.534,109.721 ccw(c136.904,109.091) 136.904,109.982 ccw(c136.904,110.873) PC2.1@137.534,110.243 ; PC2.1@137.795,109.982 133.793,109.982 121.92,98.109 112.663,98.109 108.61,94.056 102.027,94.056 100.833,95.25
NetPC2_1: PC3.1 U3.2 | length 48.6
  Bottom Layer w0.254: U3.2@99.822,90.17 101.93,90.17 103.2,88.9 111.735,88.9 114.478,86.157 134.29,86.157 PC3.1@137.795,89.662 ; U3.2@100.083,89.909 cw(c100.713,89.279) 100.713,90.17 cw(c100.713,91.061) U3.2@100.083,90.431 ; U3.2@100.263,89.729 cw(c101.326,88.666) 101.326,90.17 cw(c101.326,91.674) U3.2@100.263,90.611 ; PC3.1@137.172,89.662 cw(c135.668,89.662) 136.731,88.598 cw(c137.795,87.535) PC3.1@137.795,89.039 ; PC3.1@137.426,89.662 cw(c136.535,89.662) 137.165,89.032 cw(c137.795,88.402) PC3.1@137.795,89.293
NetPC3_1: PC4.1 U5.2 | length 61.5
  Bottom Layer w0.254: U5.2@99.822,85.09 103.124,85.09 107.01,81.204 108.61,81.204 110.922,78.892 110.922,68.224 113.335,65.811 133.502,65.811 PC4.1@137.795,70.104 ; U5.2@100.083,84.829 cw(c100.713,84.199) 100.713,85.09 cw(c100.713,85.981) U5.2@100.083,85.351 ; U5.2@100.263,84.649 cw(c101.326,83.586) 101.326,85.09 cw(c101.326,86.594) U5.2@100.263,85.531 ; PC4.1@137.172,70.104 cw(c135.668,70.104) 136.731,69.04 cw(c137.795,67.977) PC4.1@137.795,69.481 ; PC4.1@137.426,70.104 cw(c136.535,70.104) 137.165,69.474 cw(c137.795,68.844) PC4.1@137.795,69.735